# EAGLE board board (EAGLE 9.6.2)
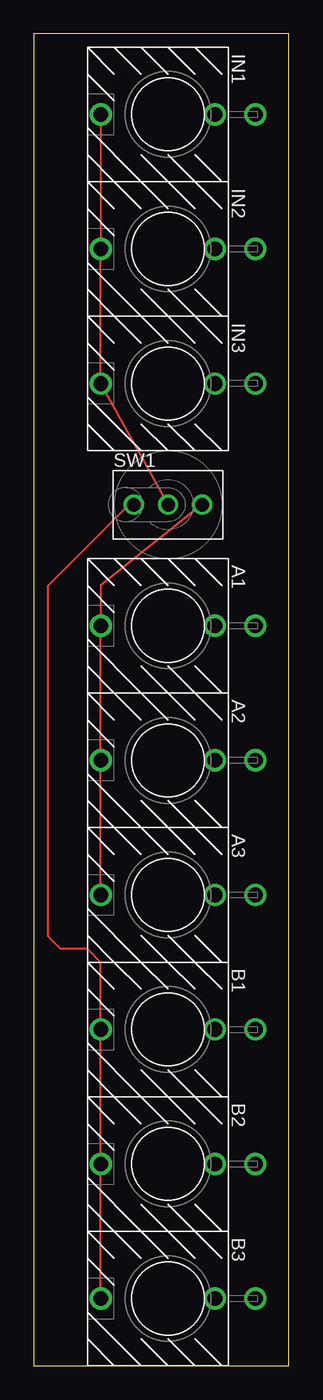
[diagram p0: board, top side]
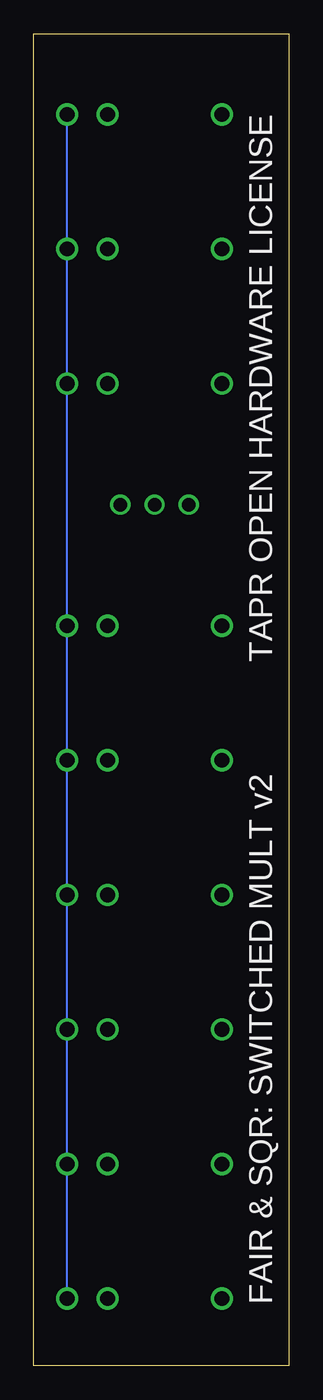
[diagram p1: board, bottom side, seen from below]

Size 19 x 99 mm. Coordinates in mm from the lower left corner, seen from the top.
Outline: 0,0 19,0 19,99 0,99 0,0
Copper layers (1*16): Top 0.035mm / dielectric 1.5mm / Bottom 0.035mm
Design rules "default": minimum track width 6mil, minimum drill 0.35mm, track to track 6mil, track to pad 6mil, pad to pad 6mil, via to via 6mil, smd to smd 6mil, copper to edge 40mil, drill to drill 6mil, minimum pad ring 10mil, minimum via ring 8mil, stop-mask expansion 4mil, vias tented up to drill 0mil, thermal gap 10mil

## Footprints (pad centres in the part's own frame; a part is rotated, then mirrored left to right if it is on the bottom)
WQP-PJ366ST_JACK = drill 1.1: P$1_TIP 0,5; P$2_SWITCH 0,-3.5; P$3_SLEEVE 0,-6.5
SUBMINI_TOGGLE = drill 1 pad 1.422: 1 -2.54,0; 3 2.54,0; COM 0,0

## Placement (x,y rotation side)
A1  THONKI-STEREO  [WQP-PJ366ST_JACK]  10,55 90 top
A2  THONKI-STEREO  [WQP-PJ366ST_JACK]  10,45 90 top
A3  THONKI-STEREO  [WQP-PJ366ST_JACK]  10,35 90 top
B1  THONKI-STEREO  [WQP-PJ366ST_JACK]  10,25 90 top
B2  THONKI-STEREO  [WQP-PJ366ST_JACK]  10,15 90 top
B3  THONKI-STEREO  [WQP-PJ366ST_JACK]  10,5 90 top
IN1  THONKI-STEREO  [WQP-PJ366ST_JACK]  10,93 90 top
IN2  THONKI-STEREO  [WQP-PJ366ST_JACK]  10,83 90 top
IN3  THONKI-STEREO  [WQP-PJ366ST_JACK]  10,73 90 top
SW1  SUBMINI_SPDT  [SUBMINI_TOGGLE]  10,64 0 top

## Library data of the parts
A1-A3 B1-B3 IN1-IN3 SW1 = MusicThingModular

## Nets
N$1: A1.P$1_TIP A2.P$1_TIP A3.P$1_TIP SW1.3
N$2: B1.P$1_TIP B2.P$1_TIP B3.P$1_TIP SW1.1
N$3: IN1.P$1_TIP IN2.P$1_TIP IN3.P$1_TIP SW1.COM
N$4: A1.P$3_SLEEVE A2.P$3_SLEEVE A3.P$3_SLEEVE B1.P$3_SLEEVE B2.P$3_SLEEVE B3.P$3_SLEEVE IN1.P$3_SLEEVE IN2.P$3_SLEEVE IN3.P$3_SLEEVE

## Tracks (layer width: path | path; a pad name or v marks a point on that pad's centre or on a via)
N$1
  Top 0.152: SW1.3 5,58 A1.P$1_TIP A2.P$1_TIP A3.P$1_TIP
N$2
  Top 0.152: SW1.1 7.09,64 1.09,58 1.09,31.91 2,31 4,31 5,30 B1.P$1_TIP B2.P$1_TIP B3.P$1_TIP
N$3
  Top 0.152: IN1.P$1_TIP IN2.P$1_TIP IN3.P$1_TIP SW1.COM
N$4
  Bottom 0.152: B3.P$3_SLEEVE B2.P$3_SLEEVE B1.P$3_SLEEVE A3.P$3_SLEEVE A2.P$3_SLEEVE A1.P$3_SLEEVE IN3.P$3_SLEEVE IN2.P$3_SLEEVE IN1.P$3_SLEEVE

## Text on the board
bPlace: TAPR OPEN HARDWARE LICENSE | FAIR & SQR: SWITCHED MULT v2